# Altium PCB PCB1.PcbDoc (part 2 of 2)
Units mil, origin at the board's own origin, x right, y up, seen from the top; angles counter-clockwise.
Board outline 1707.5 x 1259.84 mil, 4 copper layers (Top Layer, GND, Sign, Bottom Layer), stack 41.556 mil thick; 63 components, 57 nets, 288 pads, 252 vias.
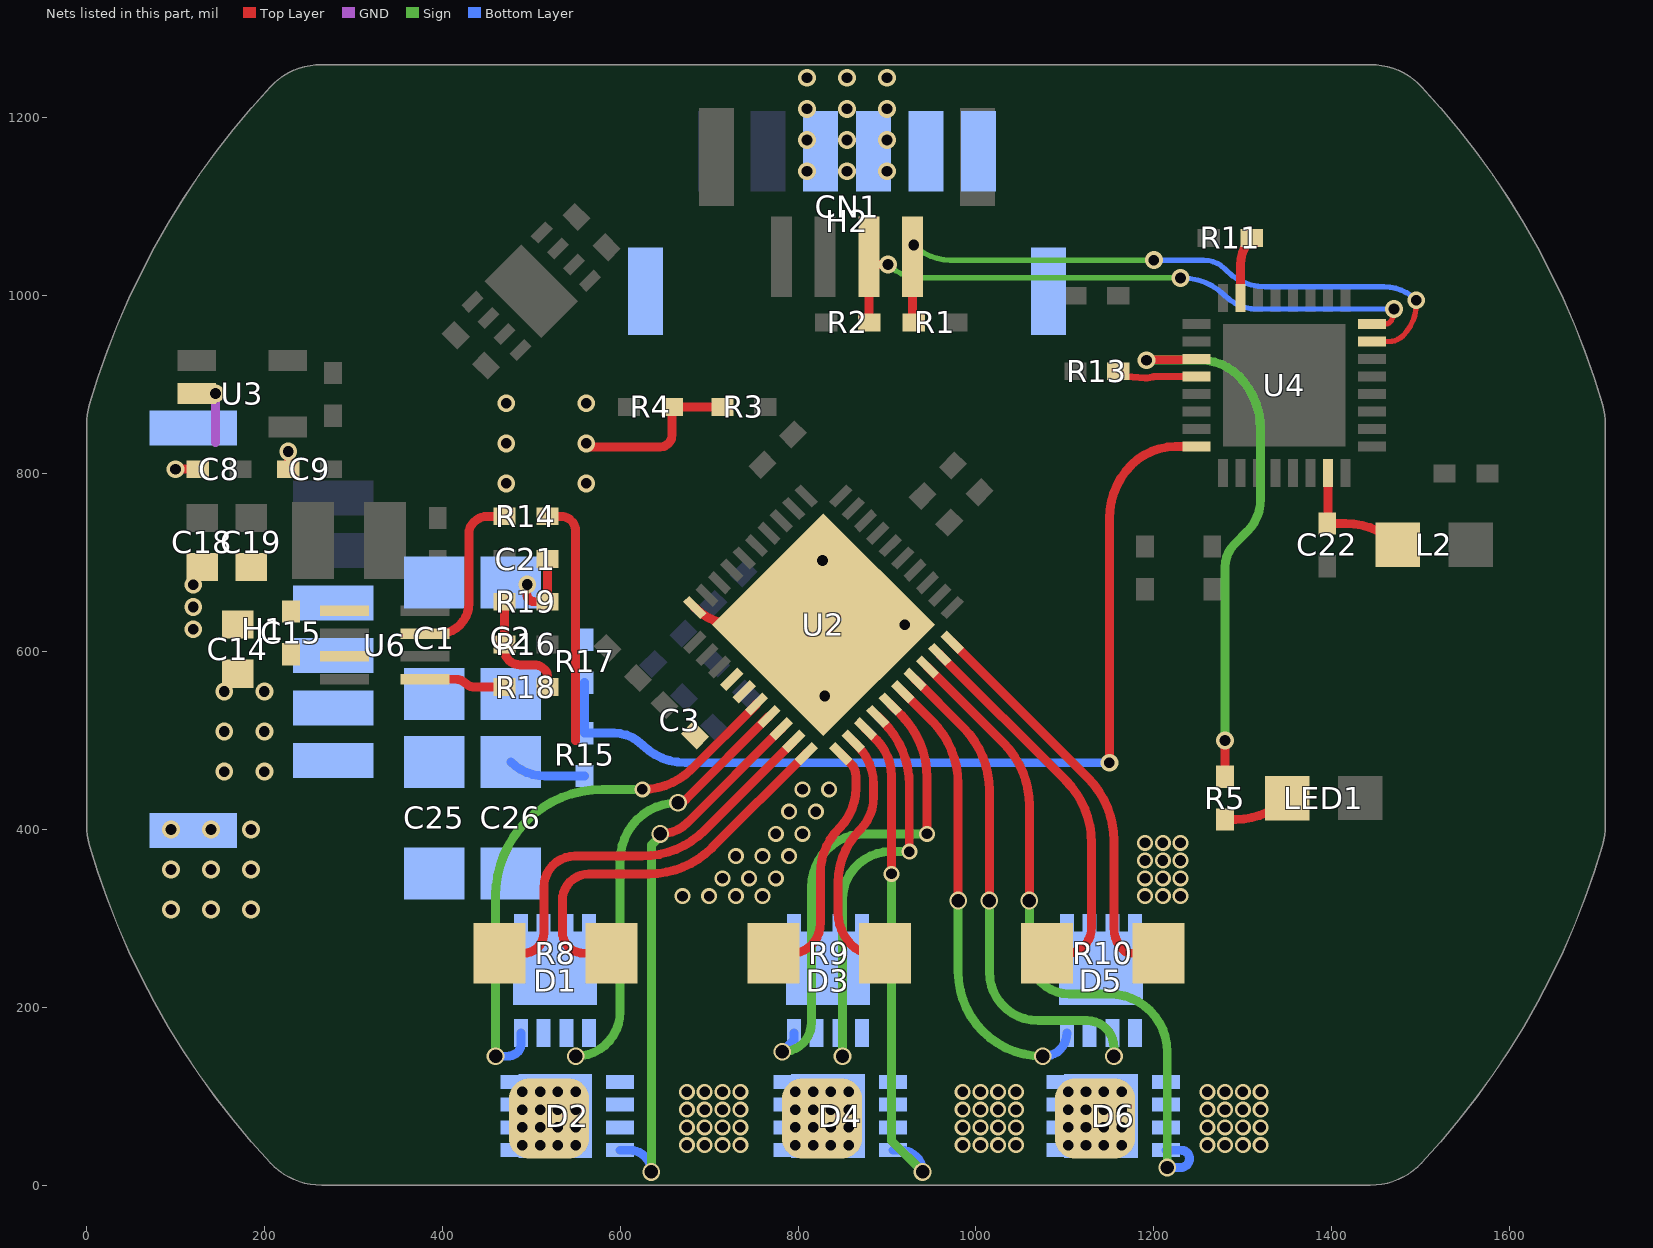
[diagram p4: the nets of this part, all layers, seen from the top]

## Via types
v1: diameter 18, hole 12, Top Layer to Bottom Layer, tented both sides, 138 vias
v2: diameter 20, hole 12, Top Layer to Bottom Layer, tented both sides, 100 vias
v3: diameter 20, hole 15, Top Layer to Bottom Layer, tented both sides, 14 vias

## Nets (pads, with @x,y where several pads share a name; then routed paths per layer and width w, separated by ;. In a path a pad name is that pad's centre, name@x,y a point inside that pad or via, vN(x,y) a via of type N, cw(c..) or ccw(c..) an arc to the next point about the centre after c; other vN are vias at no path point) (continued)
NetC22_2: C22.2 L2.2 U4.15 | length 142.4
  Top Layer w10: U4.15@1395.78,800.79 1395.78,745.88 cw(c1393.12,745.88) C22.2@1395,744 1415.48,744 cw(c1415.48,661.38) L2.2@1473.9,719.8
NetD1_G: D1.G U2.6 | length 898.7
  Top Layer w10: U2.6@753.34,540.92 680.34,467.92 ; 680.34,467.92 cw(c625,523.27) v1(625,445) ccw(c625,523.27) 680.34,467.92
  Sign w10: v3(460,145) 460,325 ; 580,445 v1(625,445) ; 460,325 cw(c580,325) 580,445 ccw(c580,325) 460,325
  Bottom Layer w10: v3(460,145) 472.93,145 ; D1.G@488.34,170.94 D1.G@488.34,158.07 ; 472.93,145 ccw(c472.93,162.07) 485,150 cw(c472.93,162.07) 472.93,145 ; D1.G@488.34,158.07 cw(c476.93,158.07) 485,150 ccw(c476.93,158.07) D1.G@488.34,158.07
NetD2_G: D2.G U2.8 | length 650.9
  Top Layer w10: U2.8@781.18,513.08 675.89,407.8 ; 675.89,407.8 cw(c645,438.69) v3(645,395) ccw(c645,438.69) 675.89,407.8
  Sign w10: v3(635,15) 635,382.29 645,392.29 v3(645,395)
  Bottom Layer w10: D2.G@599.61,39.33 610.67,39.33 cw(c610.67,15) v3(635,15)
NetD2_S: D2.S R8.2 U2.9 | length 633.5
  Top Layer w10: R8.2@464.6,260.79 R8.2@491.3,260.79 ; U2.9@795.1,499.16 695.23,399.29 ; R8.2@491.31,260.79 ccw(c491.31,283.69) 514.21,283.69 ; R8.2@491.31,260.79 ccw(c491.31,283.69) 514.21,283.69 ; 514.21,283.69 514.21,335.07 ; 514.21,335.07 cw(c549.14,335.07) 549.14,370 ; 514.21,335.07 cw(c549.14,335.07) 549.14,370 ; 549.14,370 624.52,370 ; 624.52,370 ccw(c624.52,470) 695.23,399.29 ; 624.52,370 ccw(c624.52,470) 695.23,399.29
  other v1: 675,45 695,45 715,45 735,45 675,65 695,65 715,65 735,65 675,85 695,85 715,85 735,85 675,105 695,105 715,105 735,105
NetD3_G: D3.G U2.15 | length 631.6
  Top Layer w10: U2.15@903.67,540.92 915.71,528.88 ; v1(945,395) 945,458.17 ; 915.71,528.88 cw(c845,458.17) 945,458.17 ccw(c845,458.17) 915.71,528.88
  Sign w10: v3(782.17,150) ccw(c782.17,182.83) 815,182.83 815,335 cw(c875,335) 875,395 v1(945,395)
  Bottom Layer w10: v3(782.17,150) 795.24,163.07 D3.G@795.24,170.94
NetD4_G: D4.G U2.13 | length 614.9
  Top Layer w10: U2.13@875.83,513.08 888.09,500.82 ; v1(905,350) 905,460 ; 888.09,500.82 cw(c847.28,460) 905,460 ccw(c847.28,460) 888.09,500.82
  Sign w10: v1(905,350) 905,50 v3(940,15)
  Bottom Layer w10: D4.G@906.5,39.33 915.67,39.33 cw(c915.67,15) v3(940,15)
NetD4_S: D4.S R9.2 U2.12 | length 405
  Top Layer w10: 845,339.64 cw(c930.36,339.64) 870,400 ; 845,306.21 845,339.64 ; U2.12@861.91,499.16 U2.12@866.57,494.49 ; 870,400 ccw(c833.79,436.21) 885,436.21 ; 885,436.21 885,450 ; R9.2@897.5,260.79 R9.2@882.23,260.79 ; 860,270 ccw(c882.23,292.23) R9.2@882.23,260.79 ; 860,270 cw(c896.21,306.21) 845,306.21 ccw(c896.21,306.21) 860,270 ; 860,270 ccw(c882.23,292.23) R9.2@882.23,260.79 ; U2.12@866.57,494.49 cw(c822.08,450) 885,450 ccw(c822.08,450) U2.12@866.57,494.49
  other v1: 985,45 1005,45 1025,45 1045,45 985,65 1005,65 1025,65 1045,65 985,85 1005,85 1025,85 1045,85 985,105 1005,105 1025,105 1045,105
NetD5_G: D5.G U2.16 | length 606.1
  Top Layer w10: U2.16@917.59,554.83 950.71,521.71 ; v3(980,320) 980,451 ; 950.71,521.71 cw(c880,451) 980,451 ccw(c880,451) 950.71,521.71
  Sign w10: 980,240 ccw(c1075,240) v3(1075,145) ; 980,240 v3(980,320)
  Bottom Layer w10: v3(1075,145) 1076.19,145 ccw(c1076.18,170.94) D5.G@1102.12,170.94
NetD6_G: D6.G U2.18 | length 1043.1
  Top Layer w10: U2.18@945.43,582.67 1030.71,497.39 ; v3(1060,320) 1060,426.68 ; 1030.71,497.39 cw(c960,426.68) 1060,426.68 ccw(c960,426.68) 1030.71,497.39
  Sign w10: 1060,259.87 v3(1060,320) ; 1150,215 1104.87,215 ; v3(1215,20) 1215,150 ; 1104.87,215 cw(c1104.87,259.87) 1060,259.87 ccw(c1104.87,259.87) 1104.87,215 ; 1150,215 cw(c1150,150) 1215,150 ccw(c1150,150) 1150,215
  Bottom Layer w10: D6.G@1213.39,39.33 1230.67,39.33 cw(c1230.67,30) 1240,30 ; v3(1215,20) 1230,20 ; 1240,30 cw(c1230,30) 1230,20 ccw(c1230,30) 1240,30
NetD6_S: D6.S R10.2 U2.19 | length 562.3
  Top Layer w10: U2.19@959.35,596.59 1100.71,455.23 ; R10.2@1079.6,260.79 R10.2@1103.83,260.81 ; 1130,290 1130,384.52 ; 1100.71,455.23 cw(c1030,384.52) 1130,384.52 ccw(c1030,384.52) 1100.71,455.23 ; R10.2@1103.83,260.81 ccw(c1102.77,286.62) 1121.04,268.36 ; R10.2@1103.84,260.81 ccw(c1102.77,286.62) 1121.04,268.36 ; 1121.04,268.36 ccw(c1099.39,290) 1130,290 cw(c1099.39,290) 1121.04,268.36
  other v1: 1260,45 1280,45 1300,45 1320,45 1260,65 1280,65 1300,65 1320,65 1260,85 1280,85 1300,85 1320,85 1260,105 1280,105 1300,105 1320,105
NetLED1_1: LED1.1 R5.2 | length 76.2
  Top Layer w10: R5.2@1280,411.12 1291.81,411.12 ccw(c1291.81,493.07) LED1.1@1349.75,435.12
NetR11_2: R11.2 U4.31 | length 70.7
  Top Layer w10: U4.31@1297.36,997.64 1297.36,1034.48 cw(c1340.52,1034.48) R11.2@1310,1065
NetR13_2: R13.2 U4.4 | length 90.3
  Top Layer w8: R13.2@1160,915 1168.5,909 1190.29,907.57 ccw(c1191.65,927.53) 1198.19,908.63 cw(c1200.79,901.06) 1200.79,909.06 U4.4@1248.15,909.06
NetR14_2: R14.2 U6.3 | length 198.1
  Top Layer w10: U6.3@380.55,620 395.86,620 ccw(c395.86,654.14) 420,630 ccw(c395.86,654.14) 430,654.14 430,732.88 ; 430,732.93 cw(c447.07,732.93) 435,745 435.86,745.86 cw(c450.69,731.03) 450.69,752 R14.2@470,752
NetR15_1: R15.1 R17.1 U4.8 | length 1075.9
  Top Layer w10: v2(1150,475) 1150,749.64 cw(c1235.36,749.64) 1175,810 cw(c1224.06,760.94) 1224.06,830.32 U4.8@1248.15,830.32
  Bottom Layer w10: R17.1@560,565 R15.1@560,508.2 592.97,508.2 593.03,508.2 cw(c593.13,463.13) 625,495 ; 625,495 ccw(c673.28,543.28) 673.32,475 ; 673.36,475 v2(1150,475)
NetR16_1: R16.1 R18.2 R19.2 | length 130.9
  Top Layer w10: R19.2@470,656 R16.1@470,608 470,602.07 ccw(c487.07,602.07) 475,590 ccw(c487.07,602.07) 487.07,585 502.93,585 cw(c502.93,567.93) 515,580 ; 515,580 cw(c507.27,572.27) 518.2,572.27 R18.2@518.2,560
NetR18_1: R18.1 U6.1 | length 91.8
  Top Layer w10: U6.1@380.55,568.82 415.78,568.82 cw(c415.78,555.78) 425,565 ; 425,565 ccw(c437.07,577.07) 437.07,560 R18.1@470,560
PGND: C1.1 C2.1 C8.1 C9.1 C14.1 C15.1 C18.1 C19.1 C21.1 C25.1 C26.1 H1.3 H1.4 H1.7 H1.8 H2.3 H2.4 H2.7 H2.8 R3.2 R4.2 R8.1 R9.1 R10.1 R17.2 R19.1 U2.10 U2.11 U2.20 U2.40 U2.41 U3.2 U6.5 | length 2089.3
  Top Layer w10: v2(100,805) C8.1@125,805 ; U3.2@123.81,890 v2(145,890) ; C9.1@226.8,805 v2(226.8,824.79) ; v2(495.48,675.35) 495,675.35 495,665 ccw(c504,665) 504,656 R19.1@518.2,656 C21.1@518.2,704 ; 535,285 ccw(c559.21,285) 559.21,260.79 R8.1@590,260.79 ; 535,285 535,320 ; v2(561.82,834) ccw(c565.82,834) 565.82,830 645,830 ccw(c645,843.2) 658.2,843.2 R4.2@658.2,875 R3.2@715,875 ; 565,350 632.35,350 ; R9.1@772.1,260.79 792.77,260.79 ccw(c792.77,292.23) 815,270 ; U2.10@809.01,485.24 703.07,379.29 ; 825,350 cw(c897.43,350) 846.2,401.2 ; 825,294.14 825,350 ; U2.41@828.5,630 U2.41@730.8,630 ; U2.11@847.99,485.24 859.18,474.05 ; 865,446.57 865,460 ; U2.20@973.27,610.51 1125.71,458.06 ; 1155,289.14 ccw(c1189.14,289.14) 1165,265 ; 1155,289.14 1155,387.35 ; 1165,265 ccw(c1175.16,275.16) 1175.16,260.79 R10.1@1205,260.79 ; 632.35,350 ccw(c632.35,450) 703.06,379.29 ; 632.35,350 ccw(c632.35,450) 703.06,379.29 ; U2.41@730.79,630 cw(c730.79,696.54) U2.40@683.74,649.49 ccw(c730.79,696.54) 687.88,645.69 ccw(c730.79,696.54) U2.41@730.79,630 ; 846.2,401.2 ccw(c800.86,446.57) 865,446.57 cw(c800.86,446.57) 846.2,401.2 ; 859.18,474.05 cw(c845.12,460) 865,460 ccw(c845.12,460) 859.18,474.05 ; 1125.71,458.06 cw(c1055,387.35) 1155,387.35 ccw(c1055,387.35) 1125.71,458.06 ; 535,320 cw(c565,320) 565,350 ccw(c565,320) 535,320 ; 815,270 ccw(c790.86,294.14) 825,294.14 cw(c790.86,294.14) 815,270
  GND w10: 145,835 v2(145,890)
  other v1: 670,325 700,325 730,325 760,325 1190,325 1210,325 1230,325 715,345 745,345 775,345 1190,345 1210,345 1230,345 1190,365 1210,365 1230,365 730,370 760,370 790,370 1190,385 1210,385 1230,385 775,395 805,395 790,420 820,420 805,445 835,445
  other v2: 95,310 140,310 185,310 95,355 140,355 185,355 95,400 140,400 185,400 830,550 120,625 920,630 120,650 120,675 827.42,702.42 471.82,789 561.82,789 471.82,834 471.82,879 561.82,879 810,1140 855,1140 900,1140 810,1175 855,1175 900,1175 810,1210 855,1210 900,1210 810,1245 855,1245 900,1245
SHA: D1.S D2.D pad.2@520,75 U2.7 | length 492.5
  Top Layer w10: v3(665,430) ccw(c665,442.71) 673.99,433.72 U2.7@767.26,526.99
  Sign w10: v3(550,145) ccw(c550,195) 600,195 ; 600,365 cw(c665,365) v3(665,430) ; 600,195 600,365
  other v1: 490,45 510,45 530,45 550,45 490,65 510,65 530,65 550,65 490,85 510,85 530,85 550,85 490,105 510,105 530,105 550,105
SHB: D3.S D4.D pad.2@826.89,75 U2.14 | length 607.3
  Top Layer w10: U2.14@889.75,526.99 U2.14@895.71,521.03 ; v1(925,375) 925,450.32 ; U2.14@895.71,521.03 cw(c825,450.32) 925,450.32 ccw(c825,450.32) U2.14@895.71,521.03
  Sign w10: v3(850,145) 850,321.2 ; v1(925,375) 903.8,375 ; 903.8,375 ccw(c903.8,321.2) 850,321.2 cw(c903.8,321.2) 903.8,375
  other v1: 796.89,45 816.89,45 836.89,45 856.89,45 796.89,65 816.89,65 836.89,65 856.89,65 796.89,85 816.89,85 836.89,85 856.89,85 796.89,105 816.89,105 836.89,105 856.89,105
SHC: D5.S D6.D pad.2@1133.78,75 U2.17 | length 769.6
  Top Layer w10: U2.17@931.51,568.76 985.71,514.56 ; v3(1015,320) 1015,443.84 ; 985.71,514.55 cw(c915,443.84) 1015,443.84 ccw(c915,443.84) 985.71,514.55
  Sign w10: 1015,239.99 v3(1015,320) ; 1125,185 1069.99,185 ; v3(1155,145) 1155,155 ; 1069.99,185 cw(c1069.99,239.99) 1015,239.99 ccw(c1069.99,239.99) 1069.99,185 ; 1125,185 cw(c1125,155) 1155,155 ccw(c1125,155) 1125,185
  other v1: 1103.78,45 1123.78,45 1143.78,45 1163.78,45 1103.78,65 1123.78,65 1143.78,65 1163.78,65 1103.78,85 1123.78,85 1143.78,85 1163.78,85 1103.78,105 1123.78,105 1143.78,105 1163.78,105
STATE_LED: R5.1 U4.3 | length 634.7
  Top Layer w10: v2(1191.65,927.53) 1237.4,928.24 U4.3@1248.15,928.75 ; R5.1@1280,459.32 v2(1280,500)
  Sign w10: v2(1191.65,927.53) 1252.69,927.53 cw(c1252.69,867.69) 1295,910 ; v2(1280,500) 1280,695 cw(c1316.21,695) 1290.61,720.61 1305,735 ; 1295,910 cw(c1234.64,849.64) 1320,849.64 1320,771.21 cw(c1268.79,771.21) 1305.01,735.01
SWCLK: CN1.3 R2.1 U4.24 | length 736.1
  Top Layer w6: U4.24@1445,968.11 1460.44,968.11 ccw(c1460.44,974.56) 1465,970 ccw(c1452.93,982.07) 1470,982.07 v2(1470,985)
  Top Layer w10: CN1.3@879.61,1060.39 CN1.3@879.61,1043.9 ; R2.1@880,970 879.8,970.19 CN1.3@879.8,1041.62 ; v2(901.01,1035) 886.42,1035 CN1.3@879.8,1041.62 ; CN1.3@879.61,1043.9 879.61,1041.81 CN1.3@879.8,1041.62 ; CN1.3@879.61,1043.9 879.8,1043.71 CN1.3@879.8,1041.62
  Sign w6: v2(901.01,1035) ccw(c937.22,1071.21) 903.9,1032.32 ccw(c937.22,1071.21) 937.22,1020 v2(1230,1020)
  Bottom Layer w6: v2(1230,1020) 1231.72,1020 cw(c1231.72,951.72) 1280,1000 ccw(c1316.21,1036.21) 1316.21,985 v2(1470,985)
SWDIO: CN1.4 R1.1 U4.23 | length 772
  Top Layer w6: U4.23@1445,948.43 1464.14,948.43 ccw(c1464.14,970.86) 1480,955 ; 1480,955 ccw(c1443.79,991.21) 1495,991.21 v2(1495,995)
  Top Layer w10: CN1.4@928.82,1077.37 CN1.4@928.82,1058.25 ; v2(930,1057.07) CN1.4@928.82,1058.25 ; R1.1@930,970 cw(c932.85,972.85) 928.82,972.85 CN1.4@928.82,1043.9 CN1.4@928.82,1058.25
  Sign w6: v2(930,1057.07) ccw(c971.21,1098.28) 971.21,1040 v2(1200,1040)
  Bottom Layer w6: v2(1200,1040) 1255.86,1040 cw(c1255.86,1005.86) 1280,1030 ; 1280,1030 1282.32,1027.68 ccw(c1325,1070.36) 1325,1010 1458.79,1010 cw(c1458.79,958.79) v2@1495,995
VBUS: C1.2 C2.2 C3.2 C14.2 C15.2 C25.2 C26.2 D1.D D3.D D5.D H1.1 H1.2 H2.1 H2.2 R14.1 R15.2 U2.4 U2.5 U6.7 | length 363.8
  Top Layer w10: R14.1@518.2,752 533,752 cw(c533,735) 550,735 550,500
  Bottom Layer w10: C26.2@477,476 ccw(c515.63,514.63) 515.63,460 R15.2@560,460
  other v2: 155,465 200,465 155,510 200,510 155,555 200,555
pads on no net: CN1.5 CN1.6 U2.28 U3.4 U4.29 U4.30 U5.1 U5.2 U5.3 U5.6 U5.9 U5.10 U5.11 U5.15 U5.16 U5.17 U6.8

## Polygon pours and split planes (outlines as drawn)
PGND on Bottom Layer "PGND_L04_P057" (solid, remove dead copper, pour order 57): 206.79,24.97 cw(c853.88,629.92) 3.25,382.67 cw(c78.86,404.65) 0.12,404.65 0.13,855.2 cw(c78.87,855.2) 3.25,877.17 cw(c853.88,629.92) 206.79,1234.88 cw(c264.31,1181.1) 264.31,1259.84 1443.44,1259.84 cw(c1443.44,1181.1) 1500.96,1234.88 cw(c853.88,629.92) 1704.5,877.17 cw(c1628.89,855.2) 1707.62,855.2 1707.62,404.65 cw(c1628.89,404.65) 1704.5,382.67 cw(c853.88,629.92) 1500.96,24.97 cw(c1443.44,78.74) 1443.44,0 264.31,0 cw(c264.31,78.74)
PGND on Bottom Layer "NONET_L-01_P-001" (solid, pour order 49): 230,685 ccw(c230,680) 225,680 225,580 ccw(c235,580) 235,570 320,570 ccw(c320,580) 330,580 330,605 cw(c340,605) 340,615 525,615 cw(c525,605) 535,605 535,600 ccw(c545,600) 545,590 580,590 ccw(c580,595) 585,595 585,650 cw(c595,650) 595,660 625,660 ccw(c625,670) 635,670 635,925 cw(c655,925) 655,945 890,945 ccw(c890,965) 910,965 910,1225 ccw(c895,1225) 895,1240 810,1240 ccw(c810,1230) 800,1230 800,1115 cw(c785,1115) 785,1100 775,1100 ccw(c775,1090) 765,1090 765,1075 cw(c750,1075) 750,1060 618.28,1060 ccw(c618.28,991.72) 570,1040 434.29,904.29 ccw(c505,833.58) 405,833.58 405,730 cw(c390,730) 390,715 355,715 ccw(c355,705) 345,705 345,700 cw(c330,700) 330,685
VBUS on Bottom Layer "Bottom Layer-VBUS" (solid, pour order 48): 1150,205 1533.58,205 ccw(c1533.58,305) 1604.29,234.29 1620,250 1675,355 ccw(c1626.72,403.28) 1695,403.28 1695,860 1660,965 1570,1130 1485,1215 ccw(c1424.64,1154.64) 1424.64,1240 949.14,1240 ccw(c949.14,1205.86) 925,1230 ccw(c949.14,1205.86) 915,1205.86 915,1101.21 ccw(c966.21,1101.21) 930,1065 ccw(c942.07,1077.07) 942.07,1060 1413.79,1060 cw(c1413.79,1008.79) 1450,1045 1454.39,1040.61 ccw(c1480,1066.21) 1480,1030 1483.79,1030 cw(c1483.79,978.79) 1520,1015 cw(c1471.72,966.72) 1540,966.72 1540,835.36 cw(c1454.65,835.35) 1515,775 ccw(c1575.36,714.64) 1490,714.64 1490,373.28 cw(c1421.72,373.28) 1470,325 cw(c1421.72,373.28) 1421.72,305 365,305 cw(c365,330) 340,330 340,410 515,410 ccw(c515,425) 530,425 530,585 ccw(c510,585) 510,605 355,605 ccw(c355,590) 340,590 340,585 cw(c320,585) 320,565 230,565 cw(c230,575) 220,575 220,605 ccw(c210,605) 210,615 145,615 ccw(c145,605) 135,605 135,435 ccw(c145,435) 145,425 205,425 cw(c205,415) 215,415 215,270 ccw(c280,270) 280,205 1150,205
3V3 on Bottom Layer "NONET_L-01_P-001" (solid, pour order 42): 783.54,671.46 ccw(c775,662.93) 775,675 772.07,675 ccw(c772.07,657.93) 760,670 748.54,658.54 cw(c740,667.07) 740,655 737.07,655 cw(c737.07,672.07) 725,660 713.54,671.46 ccw(c705,662.93) 705,675 ccw(c705,662.93) 696.46,671.46 657.07,632.07 ccw(c674.14,615) 650,615 ccw(c662.07,615) 653.54,606.46 662.93,597.07 cw(c645.86,580) 670,580 cw(c657.93,580) 666.46,571.46 653.54,558.54 ccw(c662.07,550) 650,550 ccw(c662.07,550) 653.54,541.46 666.46,528.54 ccw(c675,537.07) 675,525 ccw(c675,537.07) 683.54,528.54 731.46,576.46 ccw(c722.93,585) 735,585 cw(c759.14,585) 742.07,602.07 791.46,651.46 ccw(c782.93,660) 795,660 790,665
NetD6_S on Bottom Layer "NONET_L-01_P-001" (solid, pour order 38): 1203.78,125 ccw(c1203.78,120) 1198.78,120 1198.78,30 ccw(c1203.78,30) 1203.78,25 1368.78,25 ccw(c1368.78,30) 1373.78,30 1373.78,120 ccw(c1368.78,120) 1368.78,125
NetD4_S on Bottom Layer "NONET_L-01_P-001" (solid, pour order 37): 896.89,125 ccw(c896.89,120) 891.89,120 891.89,30 ccw(c896.89,30) 896.89,25 1061.89,25 ccw(c1061.89,30) 1066.89,30 1066.89,120 ccw(c1061.89,120) 1061.89,125
NetD2_S on Bottom Layer "NONET_L-01_P-001" (solid, pour order 36): 590,125 ccw(c590,120) 585,120 585,30 ccw(c590,30) 590,25 755,25 ccw(c755,30) 760,30 760,120 ccw(c755,120) 755,125
SHC on Bottom Layer "NONET_L-01_P-001" (solid, pour order 35): 1118.78,195 ccw(c1118.78,190) 1113.78,190 1113.78,135 cw(c1108.78,135) 1108.78,130 1078.78,130 ccw(c1078.78,125) 1073.78,125 1073.78,30 ccw(c1078.78,30) 1078.78,25 1183.78,25 ccw(c1183.78,30) 1188.78,30 1188.78,125 cw(c1193.78,125) 1193.78,130 1233.78,130 ccw(c1233.78,135) 1238.78,135 1238.78,190 ccw(c1233.78,190) 1233.78,195
SHB on Bottom Layer "NONET_L-01_P-001" (solid, pour order 34): 811.89,195 ccw(c811.89,190) 806.89,190 806.89,135 cw(c801.89,135) 801.89,130 771.89,130 ccw(c771.89,125) 766.89,125 766.89,30 ccw(c771.89,30) 771.89,25 876.89,25 ccw(c876.89,30) 881.89,30 881.89,125 cw(c886.89,125) 886.89,130 926.89,130 ccw(c926.89,135) 931.89,135 931.89,190 ccw(c926.89,190) 926.89,195
SHA on Bottom Layer "NONET_L-01_P-001" (solid, pour order 33): 505,195 ccw(c505,190) 500,190 500,135 cw(c495,135) 495,130 465,130 ccw(c465,125) 460,125 460,30 ccw(c465,30) 465,25 570,25 ccw(c570,30) 575,30 575,125 cw(c580,125) 580,130 620,130 ccw(c620,135) 625,135 625,190 ccw(c620,190) 620,195
DGND on Top Layer "DGND_L01_P059" (solid, remove dead copper, pour order 59): 206.79,24.97 cw(c853.88,629.92) 3.25,382.67 cw(c78.86,404.65) 0.12,404.65 0.13,855.2 cw(c78.87,855.2) 3.25,877.17 cw(c853.88,629.92) 206.79,1234.88 cw(c264.31,1181.1) 264.31,1259.84 1443.44,1259.84 cw(c1443.44,1181.1) 1500.96,1234.88 cw(c853.88,629.92) 1704.5,877.17 cw(c1628.89,855.2) 1707.62,855.2 1707.62,404.65 cw(c1628.89,404.65) 1704.5,382.67 cw(c853.88,629.92) 1500.96,24.97 cw(c1443.44,78.74) 1443.44,0 264.31,0 cw(c264.31,78.74)
PGND on Top Layer "NONET_L-01_P-001" (solid, pour order 39): 1165,285 1165,230 ccw(c1170,230) 1170,225 1245,225 ccw(c1245,230) 1250,230 1250,395 ccw(c1245,395) 1245,400 1172.72,400 ccw(c1172.72,393.16) 1165.89,393.16
PGND on Top Layer "NONET_L-01_P-001" (solid, pour order 61): 565,335 ccw(c565,325) 555,325 555,235 ccw(c565,235) 565,225 800,225 ccw(c800,230) 805,230 805,346.72 cw(c873.28,346.72) 825,395 828.79,398.79 ccw(c777.57,450) 850,450 850,457.93 ccw(c832.93,457.93) 845,470 ccw(c832.93,457.93) 832.93,475 825,475 ccw(c825,462.93) 816.46,471.46 709.29,364.29 cw(c638.58,435) 638.58,335 635,335
PGND on Top Layer "NONET_L-01_P-001" (solid, pour order 55): 205,715 cw(c205,705) 215,705 215,675 ccw(c225,675) 225,665 315,665 cw(c315,660) 320,660 320,640 cw(c315,640) 315,635 255,635 ccw(c255,630) 250,630 cw(c245,630) 245,625 205,625 ccw(c205,620) 200,620 cw(c190,620) 190,610 110,610 cw(c110,615) 105,615 105,710 cw(c110,710) 110,715
3V3 on Top Layer "NONET_L-01_P-001" (solid, pour order 54): 165,945 165,870 250,870 cw(c250,865) 255,865 255,795 ccw(c260,795) 260,790 295,790 ccw(c295,795) 300,795 300,890 ccw(c295,890) 295,895 265,895 cw(c265,900) 260,900 260,940 ccw(c255,940) 255,945
5V on Top Layer "NONET_L-01_P-001" (solid, pour order 50): 190,765 190,812.93 ccw(c172.93,812.93) 185,825 ccw(c172.93,812.93) 172.93,830 167.07,830 cw(c167.07,847.07) 155,835 153.54,836.46 cw(c162.07,845) 150,845 150,857.93 ccw(c132.93,857.93) 145,870 ccw(c132.93,857.93) 132.93,875 107.07,875 cw(c107.07,892.07) 95,880 cw(c107.07,892.07) 90,892.07 90,900 cw(c102.07,900) 93.54,908.54 95,910 cw(c107.07,897.93) 107.07,915 137.93,915 ccw(c137.93,932.07) 150,920 151.46,921.46 ccw(c142.93,930) 155,930 155,937.93 ccw(c137.93,937.93) 150,950 148.54,951.46 ccw(c140,942.93) 140,955 67.07,955 ccw(c67.07,937.93) 55,950 ccw(c67.07,937.93) 50,937.93 50,847.07 ccw(c67.07,847.07) 55,835 ccw(c67.07,847.07) 67.07,830 122.93,830 cw(c122.93,812.93) 135,825 137.93,822.07 cw(c120.86,805) 145,805 145,765
VBUS on Top Layer "NONET_L-01_P-001" (solid, pour order 47): 335,600 ccw(c330,600) 330,605 255,605 cw(c255,610) 250,610 ccw(c245,610) 245,615 210,615 ccw(c210,610) 205,610 cw(c200,610) 200,605 145,605 ccw(c145,595) 135,595 135,430 ccw(c155,430) 155,410 335,410 335,535 ccw(c320,535) 320,550 265,550 cw(c265,560) 255,560 255,570 cw(c265,570) 265,580 330,580 ccw(c330,585) 335,585
5V on Top Layer "NONET_L-01_P-001" (solid, pour order 46): 120,775 ccw(c120,765) 110,765 110,735 ccw(c120,735) 120,725 215,725 cw(c215,715) 225,715 225,685 ccw(c235,685) 235,675 275,675 ccw(c275,685) 285,685 285,765 ccw(c275,765) 275,775
NetC10_2 on Top Layer "NONET_L-01_P-001" (solid, pour order 45): 265,630 ccw(c265,625) 260,625 260,615 ccw(c265,615) 265,610 340,610 ccw(c340,620) 350,620 350,670 cw(c355,670) 355,675 ccw(c355,680) 360,680 360,765 ccw(c355,765) 355,770 315,770 ccw(c315,765) 310,765 310,680 ccw(c315,680) 315,675 320,675 cw(c320,670) 325,670 325,635 cw(c320,635) 320,630
VBUS on Top Layer "NONET_L-01_P-001" (solid, pour order 44): 757.5,562.5 738.54,581.46 ccw(c732.51,578.97) 735,585 ccw(c726.48,581.48) 730,590 660.61,520.61 cw(c635,546.2) 635,510 230,510 ccw(c229.99,485.88) 212.93,502.93 210,500 210,427.07 ccw(c227.07,427.07) 215,415 ccw(c227.07,427.07) 227.07,410 570.86,410 ccw(c570.86,444.14) 595,420 ccw(c582.93,432.07) 600,432.07 600,442.93 cw(c617.07,442.93) 605,455 cw(c617.07,442.93) 617.07,460 647.93,460 ccw(c647.93,477.07) 660,465
NetD2_S on Top Layer "NONET_L-01_P-001" (solid, pour order 40): 435,295 ccw(c435,290) 430,290 430,175 ccw(c445,175) 445,160 550,160 cw(c550,135) 575,135 575,40 ccw(c595,40) 595,20 740,20 ccw(c740,40) 760,40 760,200 ccw(c740,200) 740,220 500,220 cw(c500,225) 495,225 495,290 ccw(c490,290) 490,295
NetD6_S on Top Layer "Top Layer-NetD6_S" (solid, pour order 43): 1065,220 cw(c1065,215) 1070,215 1070,160 ccw(c1075,160) 1075,155 1195,155 cw(c1195,115) 1235,115 1235,40 ccw(c1250,40) 1250,25 1325,25 ccw(c1325,40) 1340,40 1340,205 ccw(c1325,205) 1325,220 1125,220 cw(c1125,230) 1115,230 1115,295 ccw(c1110,295) 1110,300 1050,300 ccw(c1050,295) 1045,295 1045,225 ccw(c1050,225) 1050,220
NetD4_S on Top Layer "NONET_L-01_P-001" (solid, pour order 41): 870,300 ccw(c870,295) 865,295 865,165 ccw(c880,165) 880,150 890,150 cw(c890,125) 915,125 915,40 ccw(c930,40) 930,25 1050,25 ccw(c1050,40) 1065,40 1065,200 ccw(c1050,200) 1050,215 950,215 cw(c950,220) 945,220 945,295 ccw(c940,295) 940,300
3V3 on Sign "3V3_L03_P051" (solid, remove dead copper, pour order 51): 206.79,24.97 cw(c853.88,629.92) 3.25,382.67 cw(c78.86,404.65) 0.12,404.65 0.13,855.2 cw(c78.87,855.2) 3.25,877.17 cw(c853.88,629.92) 206.79,1234.88 cw(c264.31,1181.1) 264.31,1259.84 1443.44,1259.84 cw(c1443.44,1181.1) 1500.96,1234.88 cw(c853.88,629.92) 1704.5,877.17 cw(c1628.89,855.2) 1707.62,855.2 1707.62,404.65 cw(c1628.89,404.65) 1704.5,382.67 cw(c853.88,629.92) 1500.96,24.97 cw(c1443.44,78.74) 1443.44,0 264.31,0 cw(c264.31,78.74)
DGND on GND "DGND_L02_P053" (solid, pour order 53): 0.27,860 1250,860 cw(c1250,855) 1255,855 1255,350 1694.31,350 ccw(c1372.67,443.5) 1707.62,443.51 1707.62,855.2 ccw(c1628.9,855.2) 1704.5,877.17 ccw(c853.88,629.92) 1500.96,1234.88 ccw(c1443.44,1181.1) 1443.44,1259.84 264.31,1259.84 ccw(c264.31,1181.1) 206.79,1234.88 ccw(c853.87,629.92) 3.25,877.17 ccw(c78.86,855.2)
PGND on GND "PGND_L02_P052" (solid, remove dead copper, pour order 52): 0.12,404.65 0.13,850 1245,850 1245,345 ccw(c1250,345) 1250,340 1690.91,340 cw(c853.88,629.92) 1500.96,24.97 cw(c1443.44,78.74) 1443.44,0 264.31,0 cw(c264.31,78.74) 206.79,24.97 cw(c853.88,629.92) 3.25,382.67 cw(c78.86,404.65)

## Silkscreen, mask and mechanical layers (free items; w line width, h text height)
Top Overlay:
  text "3V3 GND CLK DIO" at 695,910.3 h60
  text "L H G G V V" at 10.6,825 h120 r270
  text "A" at 500,140 h60
  text "B" at 806.89,140 h60
  text "C" at 1113.78,140 h60
Bottom Overlay:
  drawing of 3 lines, arcs and shapes, not listed
  text "V V G G H L" at 1050,855.6 h120
  text "ZQ FOC Lite" at 1680,752.24 h150
  text "2025/05/19" at 1680,545.34 h150
  text "DreamChaser Tech™" at 1680,360.75 h150
Mechanical 1:
  circle w0.5: c317.98,94.02 r49.21
  circle w0.5: c317.98,1165.82 r49.21
  circle w0.5: c1389.77,94.02 r49.21
  circle w0.5: c1389.77,1165.82 r49.21
  lines w2: -0.12,404.65 0.12,404.65
  lines w10: 0.12,404.65 ccw(c78.87,404.65) 3.25,382.67 ccw(c853.88,629.92) 206.79,24.97 ccw(c264.31,78.74) 264.31,0 1443.44,0 ccw(c1443.44,78.74) 1500.96,24.97 ccw(c853.88,629.92) 1704.5,382.67 ccw(c1628.88,404.65) 1707.62,404.65 1707.62,855.2 ccw(c1628.88,855.2) 1704.5,877.17 ccw(c853.88,629.92) 1500.96,1234.88 ccw(c1443.44,1181.1) 1443.44,1259.84 264.31,1259.84 ccw(c264.31,1181.1) 206.79,1234.88 ccw(c853.88,629.92) 3.25,877.17 ccw(c78.87,855.2) 0.12,855.2 0.12,404.65